# Altium PCB BOOST.PcbDoc
Units mil, origin at the board's own origin, x right, y up, seen from the top; angles counter-clockwise.
Board outline 720 x 873.62 mil, 2 copper layers (Top Layer, Bottom Layer); 18 components, 12 nets, 44 pads, 25 vias.
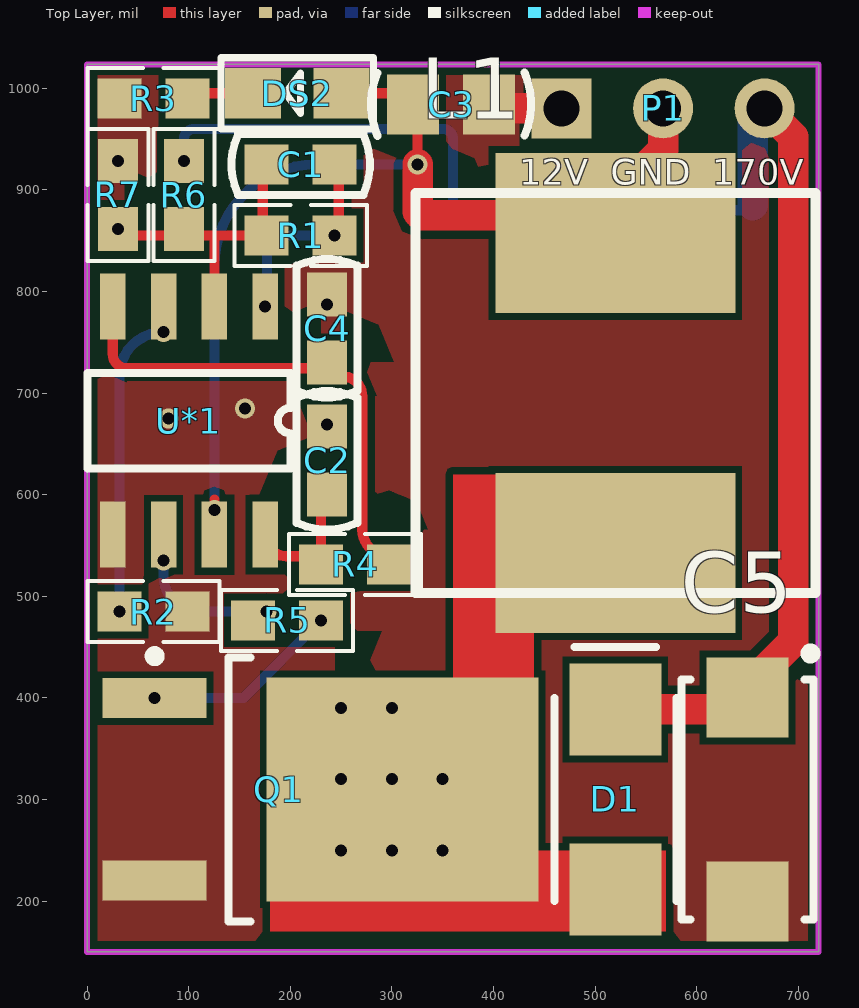
[diagram p0: Top Layer view]
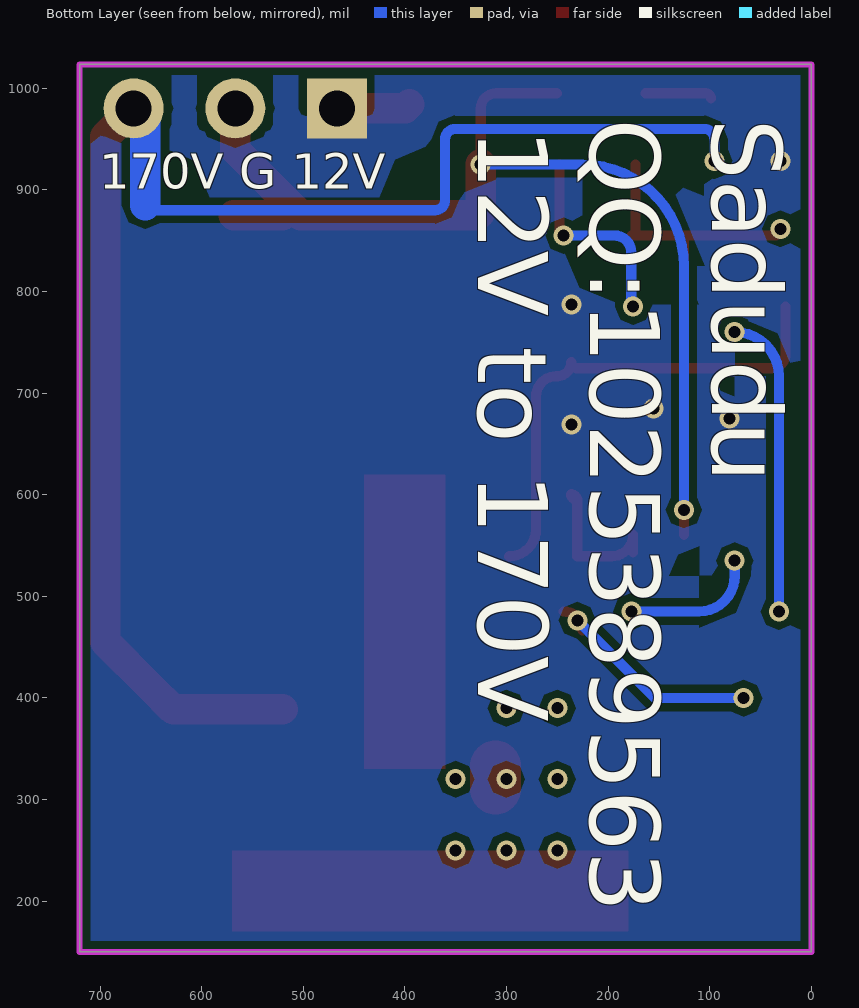
[diagram p1: Bottom Layer view, seen from below]

## Layer stack, top to bottom
Top Solder: solder mask 0.4, Solder Resist, Dk 3.5
Top Layer: signal copper 1.4
Dielectric 1: dielectric 12.6, FR-4, Dk 4.8
Bottom Layer: signal copper 1.4
Bottom Solder: solder mask 0.4, Solder Resist, Dk 3.5

## Board outline
0,150 0,1023.62 720,1023.62 720,150

## Design rules (kind name [scope] priority, off if disabled: settings)
Clearance [All] p1: gap=7
MinimumSolderMaskSliver [All] p1: minsoldermaskwidth=7
PolygonConnect [All] p1: connectstyle=Direct reliefconductorwidth=118.11 reliefentries=4 polygonreliefangle="90 Angle" airgapwidth=118.11
RoomDefinition 原理图 [InComponentClass('原理图')] p1: confinementstyle=ConfineIn formatcopy=TRUE lockcomponents=FALSE outline -3219.67,-2390 -1219.67,-2390 -1219.67,-1390 -3219.67,-1390
RoutingCorners [All] p1: cornerstyle=Round minsetback=100 maxsetback=100
RoutingVias [All] p1: holewidth=28 width=50 viastyle="Through Hole" minholewidth=28 minwidth=50 maxholewidth=28 maxwidth=50
SilkToSilkClearance [All] p1 off: silktosilkclearance=10
SilkToSolderMaskClearance [IsPad] p1 off: minsilkscreentomaskgap=10 clearancetoexposedcopper=TRUE
SolderMaskExpansion [All] p1: expansion=4
UnpouredPolygon [All] p1: allowunpoured=FALSE
Width [All] p1: maxlimit=100 minlimit=10 preferedwidth=10
25 further rules are at their usual default settings.

## Components (designator, comment, footprint, x,y, rotation, side; value= is the part's Value field where it differs from the comment)
C1 "100pf/50V/0603" C-RAD-0603 210.33,925 r0 top
C2 "104/50V/0603" C-RAD-0603 236.22,633.86 r270 top
C3 "470uF/10*10/25V" C-RAD-0805 358.27,984.25 r0 top
C4 "2nf/50V/0603" C-RAD-0603 236.22,763.78 r270 top
C5 "10uF/10*10/400V" 5032 650,300 r270 top
D1 "D-Schottky" DIODE-SMA 520,300 r90 top
DS2 "GREEN/0805" SMDLED 250.33,995 r180 top
L1 "10*10/150uH" L1010 520,700 r270 top
P1 "Header 3" HEADER-3 566.93,980.32 r0 top
Q1 "MOSFET-N" D-PAK 230,310 r0 top
R1 "Res1" 0603-1 210.33,855 r0 top
R2 "Res1" 0603-1 65.33,485 r180 top
R3 "Res1" 0603-1 65.33,990 r0 top
R4 "Res1" 0603-1 263.78,531.5 r0 top
R5 "Res1" 0603-1 196.85,476.38 r0 top
R6 "Res1" 0603-1 95.33,895 r90 top
R7 "Res1" 0603-1 30.33,895 r270 top
U*1 "UC3843" SOP-8 175.33,785 r270 top

## Footprints (in the part's own frame and the unit in brackets; to place one, negate y for a bottom-side part, rotate by r counter-clockwise, add the part's x,y. Pads: shape width x height; smd on the part's side, far side on the other; paste and mask are expansions set on the pad)
0603-1 [mm] "贴片带丝印"
  rect 1.1x1 smd: 1(-0.85,0) 2(0.85,0)
  silkscreen extent -1.65,-0.76 1.65,0.76, body extent -1.14,-0.38 1.14,0.38, height 1
5032 [mm] "XTAL_8M 2-Leads, Body 6.00x3.20mm, IPC Medium Density"
  rect 2x2.05 smd: 1(-2.55,0) 2(2.55,0)
  silkscreen extent -3.77,-1.65 3,1.7, body extent -3,-1.6 3,1.6, height 1.2
C-RAD-0603 [mm] "贴片电容"
  rect 1.1x1 smd: 1(-0.85,0) 2(0.85,0)
  silkscreen extent -1.73,-0.76 1.73,0.76, body extent -1.14,-0.38 1.14,0.38, height 1
C-RAD-0805 [mm] "贴片电容"
  rect 1.3x1.5 smd: 1(-0.95,0) 2(0.95,0)
  silkscreen extent -2,-0.79 2,0.79, body extent -1.27,-0.64 1.27,0.64, height 0.9
D-PAK [mm] "D-PAK, 3-Pads, Body 6.20x6.66mm (max), IPC Medium Density"
  rect 2.6x1 smd: 1(-4.15,2.28) 3(-4.15,-2.28)
  rect 6.8x5.6 smd: 2(2.05,0)
  silkscreen extent -4.27,-3.3 -1.75,3.45, body extent -4.6,-3.3 4.65,3.3, height 2.31
DIODE-SMA [mm] "贴片二极管"
  rect 2.3x2.3 smd: 1(-2.25,0) 2(2.25,0)
  silkscreen extent -2.54,-1.52 3.81,1.52, body extent -2.92,-1.4 2.92,1.4, height 3
HEADER-3 [mm]
  rect 1.5x1.5 hole 0.9: 1(-2.54,0)
  round 1.5 hole 0.9: 2(0,0) 3(2.54,0)
L1010 [mm]
  rect 4x6 smd: 1(-4,0) 2(4,0)
  silkscreen extent -5,-5 5,5, body extent -5,-5 5,5, height 4
SMDLED [mm]
  rect 1.4x1.27 smd: 1(0.001,-0.002) 2(2.211,-0.002)
  silkscreen extent -0.8,-0.89 3.01,0.89, body extent 0.13,-0.62 2.15,0.63, height 1.1
SOP-8 [mil]
  rect 65x25 smd: 1(0,0) 2(0,-50) 3(0,-100) 4(0,-150) 5(224.41,-150) 6(224.41,-100) 7(224.41,-50) 8(224.41,0)
  silkscreen extent 65,-175 159,25, body extent -9,-174 229,24, height 63

## Part data
C1 C2 C4: library part C_1
C3 C5: library part CAP
D1: "肖特基二极管"
DS2: library part LED2, "Typical RED, GREEN, YELLOW, AMBER GaAs LED"
L1: library part L
P1: "接插件"
Q1: "N-Channel MOSFET"
R1 R2 R3 R4 R5 R6 R7: "贴片电阻"

## Via types
v1: diameter 19.68, hole 11.81, Top Layer to Bottom Layer, 14 vias
v2: diameter 19.68, hole 11.81, Top Layer to Bottom Layer, tented both sides, 11 vias

## Nets (pads, with @x,y where several pads share a name; then routed paths per layer and width w, separated by ;. In a path a pad name is that pad's centre, name@x,y a point inside that pad or via, vN(x,y) a via of type N, cw(c..) or ccw(c..) an arc to the next point about the centre after c; other vN are vias at no path point)
12V: C3.1 DS2.1 L1.1 P1.2 U*1.7 | length 1075.5
  Top Layer w10: U*1.7 v2(125.33,585) 125.33,595 ; DS2.1 310.27,995.06 cw(c310.27,980) 325.33,980 v2(325.33,925.12)
  Top Layer w30: v2(325.33,925.12) 325.33,880 ccw(c330.33,880) 330.33,875 502.48,875 566.93,939.45 P1.2 ; L1.1@520,875 L1.1@568.28,875
  Bottom Layer w10: v2(125.33,585) 125.33,825 cw(c225.33,825) 225.33,925 225.33,925.12 v2(325.33,925.12)
170V: C5.1 D1.2 P1.3 R6.2 | length 1485.8
  Top Layer w30: D1.2 628.19,388.58 650,410.39 695.05,455.44 695.05,952.2 P1.3
  Bottom Layer w10: v2(95.33,928.46) 95.33,950 cw(c105.33,950) 105.33,960 350.33,960 cw(c350.33,950) 360.33,950 360.33,890 ccw(c370.33,890) 370.33,880 650.33,880 ccw(c650.33,885) 655.33,885
  Bottom Layer w30: 655.33,885 P1.3@655.33,970
GND: C2.1 C3.2 C4.1 C5.2 P1.1 Q1.3 R2.1 R3.1 R7.1 U*1.5 | length 72.9
  Top Layer w30: C3.2 399.61,980.32 P1.1
  other v1: 236.22,669.29 236.22,787.4
  other v2: 80.33,675 155.33,685 30.33,928.46
NetC1_2: C1.2 R1.2 U*1.1 | length 202.3
  Top Layer w10: v1(243.8,855) 247.73,858.94 C1.2@247.73,925
  Bottom Layer w10: v1(175.33,785) ccw(c175.33,786.84) 177.17,786.84 177.17,838.58 cw(c193.58,838.58) 193.58,855 v1(243.8,855)
NetC2_2: C2.2 R4.1 U*1.8 | length 167.3
  Top Layer w10: U*1.8@175.33,543.31 U*1.8 ccw(c196.55,560.59) 196.55,539.37 230.32,539.37 C2.2@230.32,594.49 ; C2.2@230.32,594.49 ccw(c230.32,600.39) C2.2 ; C2.2@230.32,594.49 cw(c236.22,594.49) C2.2 ; C2.2@230.32,594.49 cw(c236.22,594.49) C2.2
NetC4_2: C4.2 R4.2 U*1.4 | length 495.1
  Top Layer w10: U*1.4 25.33,738.45 ccw(c39.37,738.45) 39.37,724.41 230.32,724.41 ccw(c230.32,730.31) C4.2 ccw(c250,730.31) 250,716.54 251.22,716.54 cw(c251.22,696.85) 270.91,696.85 270.91,565.71 ccw(c297.24,565.71) R4.2@297.24,539.37
NetD1_1: D1.1 L1.2 Q1.2 | length 23.2
  Top Layer w50: Q1.2 Q1.2@310.71,333.23
  other v1: 250,250 300,250 350,250 250,320 300,320 350,320 250,390 300,390
NetDS2_2: DS2.2 R3.2 | length 67.4
  Top Layer w10: R3.2 cw(c103.86,990) 103.86,995.06 DS2.2
NetQ1_G: Q1.1 R5.2 | length 224.8
  Top Layer w10: R5.2@225.09,466.3 cw(c243.8,466.3) R5.2@243.8,485
  Bottom Layer w10: v1(66.61,399.76) 153.7,399.76 v1(230.32,476.38)
NetR2_2: R2.2 U*1.3 | length 299.8
  Bottom Layer w10: v2(31.87,485) 31.87,716.54 cw(c75.33,716.54) v2(75.33,760)
NetR5_1: R5.1 U*1.6 | length 136.5
  Bottom Layer w10: v2(75.33,535) 75.33,520 ccw(c110.33,520) 110.33,485 v2(176.87,485)
VFB: C1.1 R1.1 R6.1 R7.2 U*1.2 | length 292.5
  Top Layer w10: v2(30.33,861.54) ccw(c36.87,861.54) 36.87,855 125.33,855 ; U*1.2 125.33,855 ; C1.1@172.93,925 172.93,858.94 ccw(c176.87,858.94) R1.1 125.33,855

## Polygon pours and split planes (outlines as drawn)
GND on Top Layer "Top Layer-No Net 1" (solid, pour order 4): 0,1023.62 720,1023.62 720,150 0,150
GND on Bottom Layer "Top Layer-No Net 1" (solid, pour order 6): 0,1023.62 720,1023.62 720,150 0,150

## Keep-outs
Keep-Out Layer:
  the board outline again, w5.91

## Other copper
Top Layer:
  rectangle net NetD1_1: 180,170 570,250
  rectangle net NetD1_1: 360,330 440,620

## Silkscreen, mask and mechanical layers (free items; w line width, h text height)
Top Overlay:
  text "12V" at 425.33,905 h25
  text "GND" at 515.33,905 h25
  text "170V" at 615.33,905 h25
Bottom Overlay:
  text "Sadudu" at 120,970 h118.11 r90
  text "QQ:1025389563" at 240,970 h118.11 r90
  text "12V to 170V" at 350.33,960 h118.11 r90
  text "170V G 12V" at 700.79,889.76 h59.06